# Altium PCB PX4FMUv2.4.6.PcbDoc (part 2 of 3)
Units mil, origin at the board's own origin, x right, y up, seen from the top; angles counter-clockwise.
Board outline 2695 x 2965 mil, 2 copper layers (Top, Bottom), stack 12.756 mil thick; 257 components, 261 nets, 1127 pads, 374 vias.
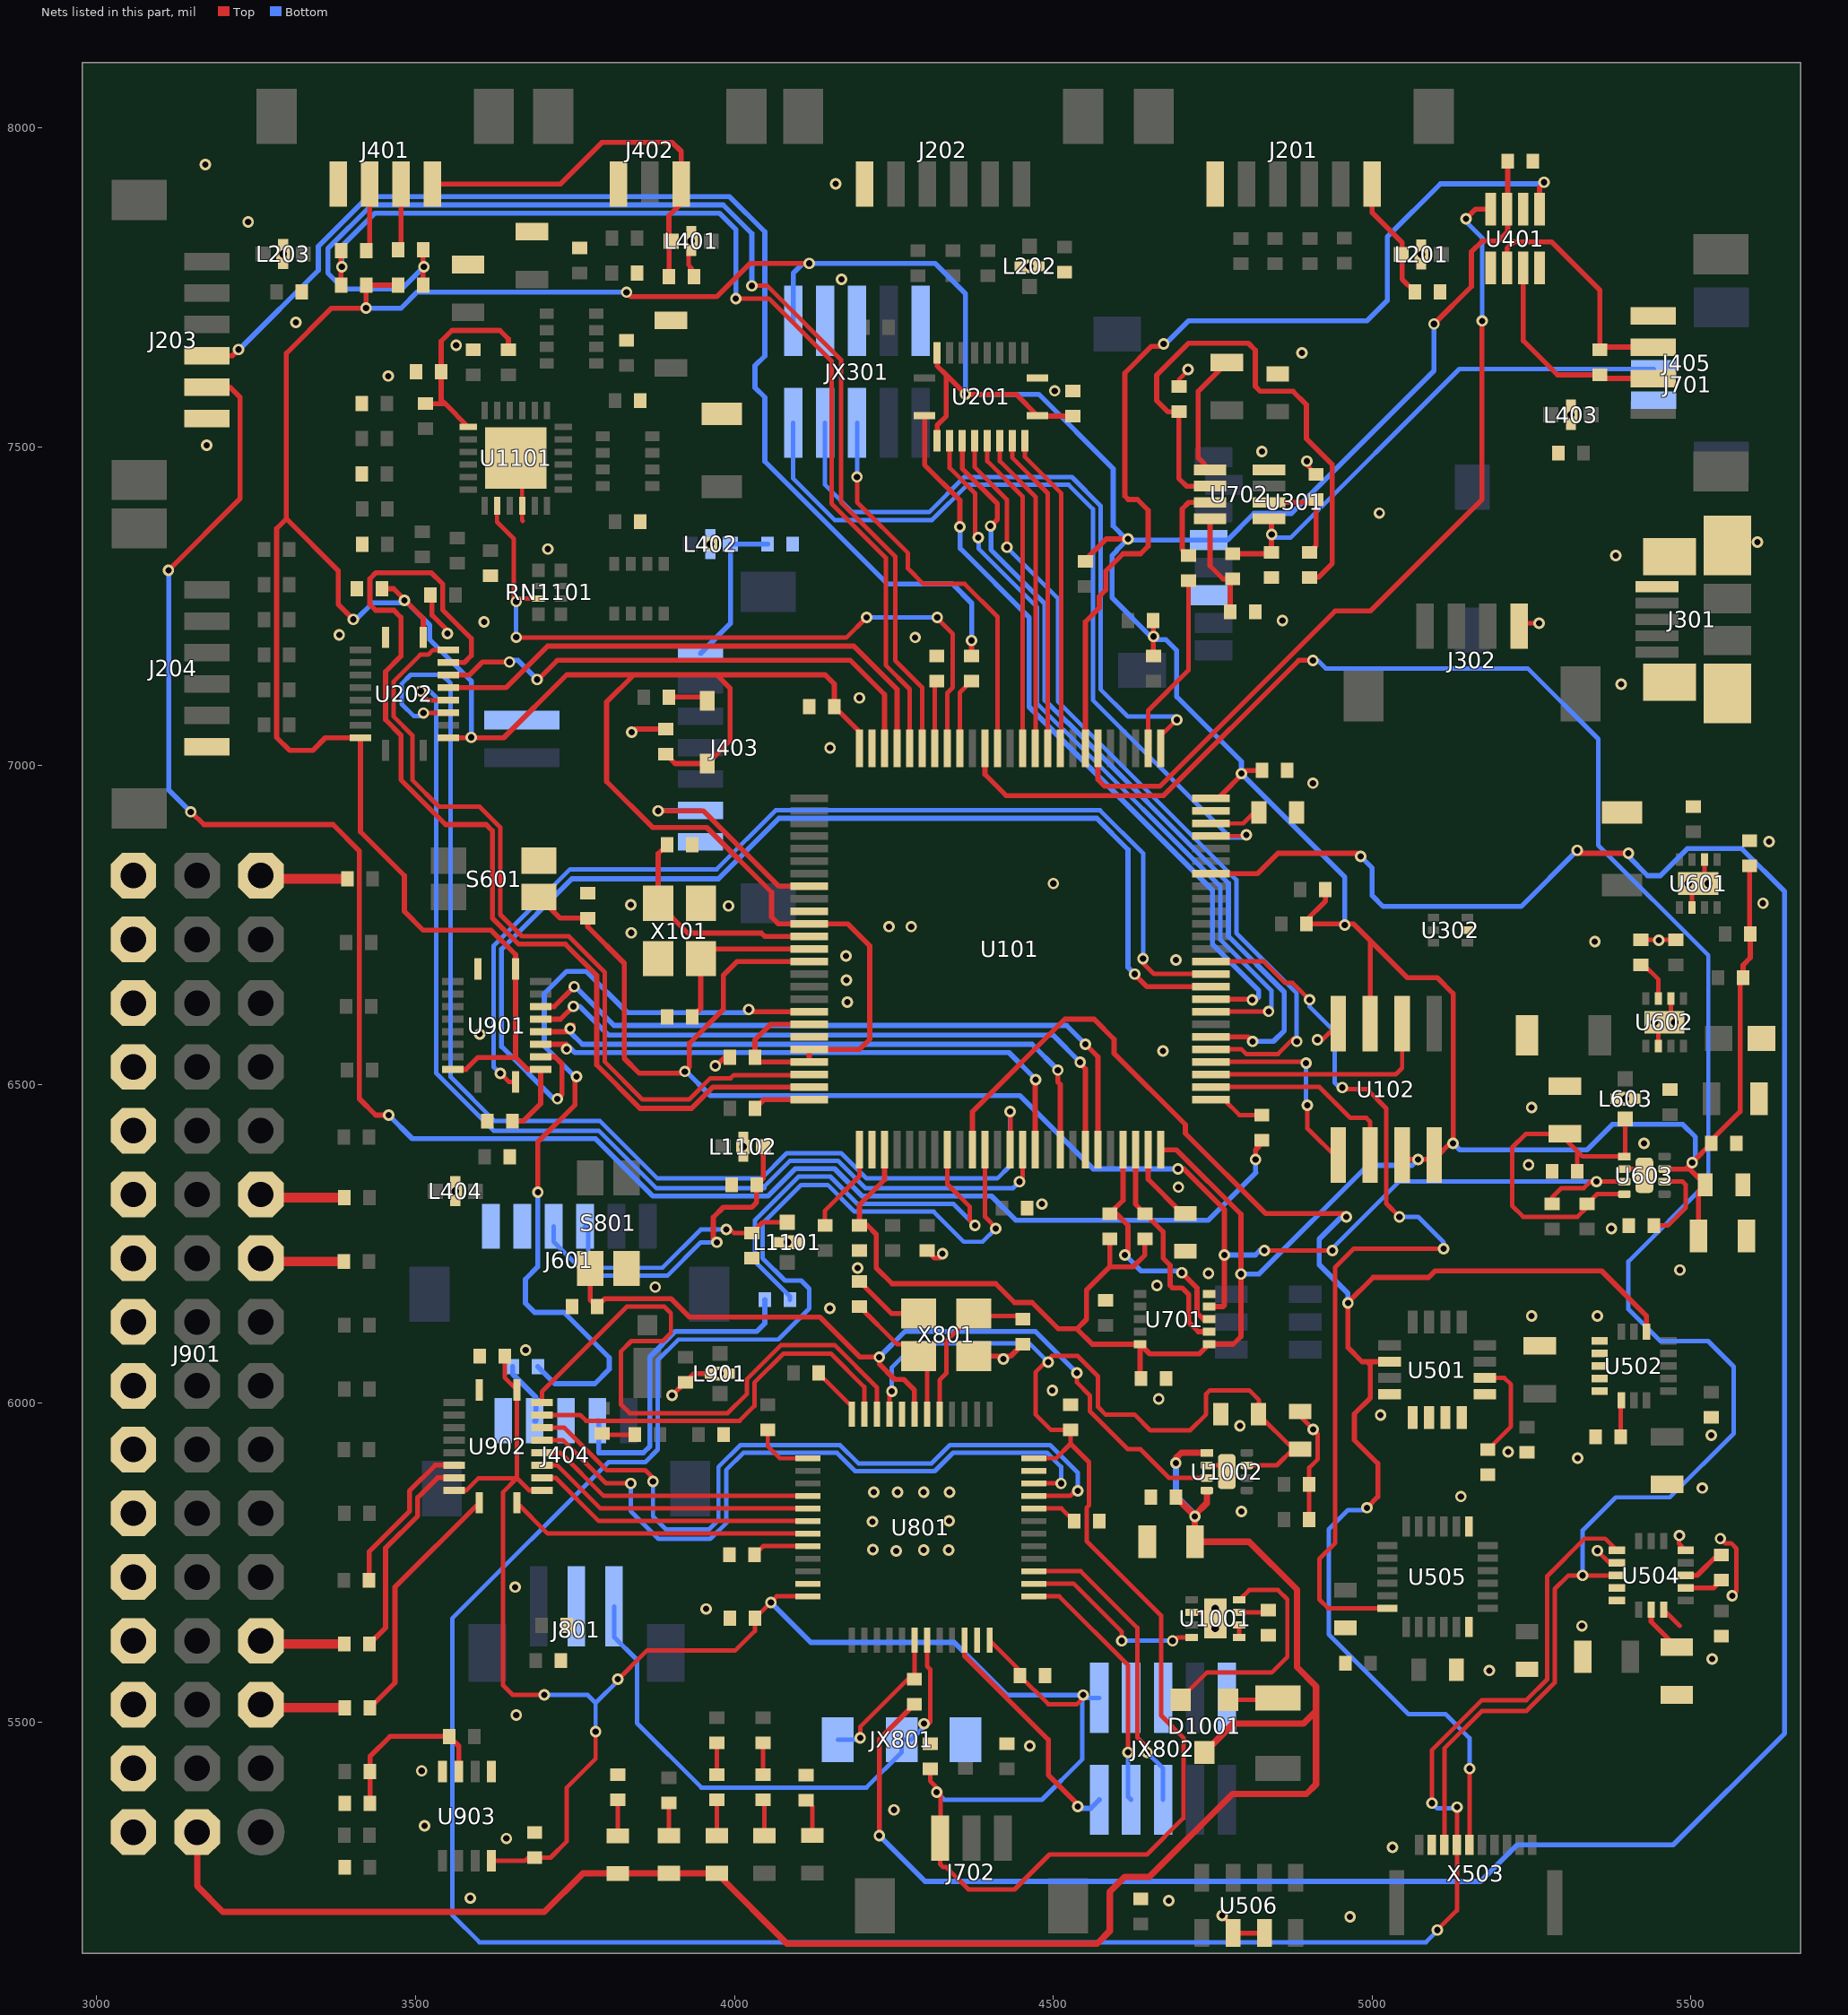
[diagram p2: the nets of this part, all layers, seen from the top]

## Via types
v1: diameter 18, hole 10, Top to Bottom, 374 vias

## Nets (pads, with @x,y where several pads share a name; then routed paths per layer and width w, separated by ;. In a path a pad name is that pad's centre, name@x,y a point inside that pad or via, vN(x,y) a via of type N, cw(c..) or ccw(c..) an arc to the next point about the centre after c; other vN are vias at no path point) (continued)
!VDD_SERVO_VALID: RN1101.3 U101.93 U1101.P$8 | length 1149.9
  Top w7: U1101.P$8@3627.65,7407.68 3627.65,7382.37 3635.34,7374.68 3635.45,7374.68 3654.03,7356.1 3654.03,7261.47 v1(3657.82,7257.68) 3662.43,7262.29 RN1101.3@3692.34,7262.29 ; v1(3657.82,7201.49) 3658.63,7200.68 4175.34,7200.68 v1(4207.34,7232.68) ; v1(4318.13,7232.68) 4316.55,7232.68 4317.34,7231.89 4342.34,7206.89 4342.34,7122.68 4333.91,7114.25 U101.93@4333.91,7027.64
  Bottom w7: v1(3657.82,7201.49) v1(3657.82,7257.68) ; v1(4207.34,7232.68) 4208.13,7232.68 v1(4318.13,7232.68)
ACCEL_DRDY: U101.90 U504.11 X503.3 | length 3471.9
  Top w7: X503.3@5113.6,5307.68 5113.6,5458.94 5172.34,5517.68 5242.34,5517.68 5286.83,5562.17 5286.83,5709.13 5307.98,5730.28 v1(5330.53,5730.28) U504.11@5384.02,5730.28
  Top w8: U101.90@4392.97,7027.64 4392.97,6986.42 4426.1,6953.29 4673.26,6953.29 4885.25,7165.28 v1(4907.34,7165.28)
  Bottom w7: v1(4907.34,7165.28) 4914.74,7165.28 4927.34,7152.68 5244.31,7152.68 5355,7041.99 5355,6875.2 5527.62,6702.59 5527.62,6347.96 5402.34,6222.68 5402.34,6147.68 5452.34,6097.68 5527.34,6097.68 5567.34,6057.68 5567.34,5952.68 5467.34,5852.68 5382.34,5852.68 5330.53,5800.87 v1(5330.53,5730.28) v1@5329.94,5730.28
ALARM: R701.P$2 U101.77 | length 288.8
  Top w7: U101.77@4648.88,7027.64 4648.88,7086.38 4712.34,7149.84 R701.P$2@4712.34,7290.16
BATT_CURRENT_SENS: R1101.P$1 U101.26 | length 140.9
  Top w7: R1101.P$1@4142.34,6279.07 4142.34,6302.68 4196.12,6356.46 U101.26@4196.12,6397.72
BATT_CURRENT_SENS_PROT: J601.3 L1101.P$1 R1104.P$1 | length 455.1
  Top w7: v1(3987.34,6272.68) 3992.34,6274.07 3999.04,6267.37 R1104.P$1@4027.34,6267.37 4044.15,6284.18 L1101.P$1@4083.09,6284.18
  Bottom w7: J601.3@3765.77,6277.68 J601.3@3771.04,6277.68 ; v1(3987.34,6272.68) 3947.34,6272.68 3887.34,6212.68 3788.05,6212.68 3771.04,6229.69 ; 3771.04,6229.69 J601.3@3771.04,6277.68 ; 3771.04,6229.69 J601.3@3771.04,6277.68
BATT_VOLTAGE_SENS: R1102.P$1 U101.25 | length 90.7
  Top w8: R1102.P$1@4032.34,6462.68 4046.12,6476.46 U101.25@4117.38,6476.46
BATT_VOLTAGE_SENS_PROT: J601.4 L1102.P$1 R1103.P$1 | length 539.2
  Top w8: v1(3972.34,6252.68) 3966.95,6258.07 3966.95,6291.81 3982.82,6307.68 4027.34,6307.68 4034.86,6315.2 R1103.P$1@4034.86,6342.68 4045.34,6353.16 L1102.P$1@4045.34,6402.68
  Bottom w7: J601.4@3716.55,6277.68 3716.55,6253.47 3769.34,6200.68 3895.34,6200.68 3947.34,6252.68 v1(3972.34,6252.68) v1@3977.34,6252.68
CAN1_RX: U101.81 U401.4 | length 1338.5
  Top w8: U101.81@4570.14,7027.64 4570.14,6978.35 4580.81,6967.68 4667.34,6967.68 4942.34,7242.68 4997.34,7242.68 5172.66,7418 v1(5172.66,7697.68) ; v1(5147.34,7857.68) 5162.69,7873.03 U401.4@5186.15,7873.03
  Bottom w7: v1(5147.34,7857.68) 5148.13,7852.68 5173.45,7827.36 5172.66,7826.57 v1(5172.66,7697.68)
CAN1_TX: U101.82 U401.1 | length 1553.8
  Top w8: U101.82@4550.45,7027.64 4550.45,7225.79 4572.34,7247.68 4572.34,7265.45 4582.34,7275.45 4582.34,7305.3 4609.51,7332.47 4637.13,7332.47 4648.88,7344.22 4648.88,7400.83 4632.03,7417.68 4617.65,7417.68 4612.34,7422.99 4612.34,7615.92 4654.14,7657.72 v1@4672.3,7657.72 ; U401.1@5262.93,7873.03 5262.93,7907.48 5270,7914.56 v1(5270,7915)
  Bottom w8: v1@4672.3,7657.72 4672.34,7657.68 4712.34,7697.68 4992.34,7697.68 5024.22,7729.56 5024.22,7829.56 5107.34,7912.68 5262.34,7912.68 5264.65,7915 v1(5270,7915)
  other v1: 4673.26,7661.54
CAN2_RX: R216.P$1 U101.51 | length 90
  Top w7: U101.51@4747.3,6476.46 4767.94,6476.46 4792.03,6452.37 R216.P$1@4827.34,6452.37
CAN2_TX: R215.P$1 U101.92 | length 112.9
  Top w7: U101.92@4353.6,7027.64 4353.6,7114.65 R215.P$1@4371.94,7132.99
CAN_H: J405.2 R409.P$1 U401.7 | length 342.2
  Top w8: U401.7@5237.34,7780.51 5237.34,7666.54 5290.89,7612.99 R409.P$1@5357.54,7612.99 5363.21,7607.32 J405.2@5441.04,7607.32
CAN_L: J405.3 R409.P$2 U401.6 | length 390.9
  Top w8: U401.6@5211.74,7780.51 5211.74,7811.14 5222.34,7821.74 5281.55,7821.74 5357.54,7745.75 R409.P$2@5357.54,7652.37 5361.71,7656.54 J405.3@5441.04,7656.54
FMU-!RESET: C609.P$2 R635.P$1 S601.A1 U101.14 U603.3 U701.4 | length 2640.6
  Top w7: v1(4831.33,6239.69) v1(4938.14,6239.69) ; R635.P$1@5282.65,6312.68 5282.65,6322.99 5297.34,6337.68 5332.34,6337.68 5342.5,6347.84 U603.3@5395.84,6347.84
  Top w8: S601.A1@3693.52,6794.14 3726.55,6761.11 C609.P$2@3770.09,6761.11 3770.09,6747.49 3827.34,6690.24 3827.34,6541.11 3850.77,6517.68 v1@3919.44,6517.68 ; v1(3922.34,6520.58) 3929.44,6527.68 3929.44,6564.78 3982.82,6618.16 3982.82,6671.74 4004.07,6692.99 U101.14@4117.38,6692.99 ; v1(4695.8,6367.68) 4704.94,6367.68 4768.52,6304.1 v1(4768.52,6232.68) 4768.52,6153.86 4766.52,6151.86 U701.4@4744.5,6151.86
  Bottom w7: v1(4938.14,6239.69) 4938.14,6243.48 5042.45,6347.79 v1(5352.34,6347.79)
  Bottom w8: v1@3919.44,6517.68 v1(3922.34,6520.58) v1@3923.39,6521.63 ; v1@3922.08,6522.94 v1@3923.39,6521.63 ; v1(4695.8,6367.68) 4562.91,6367.68 4447.91,6482.68 3962.34,6482.68 v1@3923.39,6521.63 ; v1(4768.52,6232.68) 4817.18,6232.68 4824.19,6239.69 v1(4831.33,6239.69)
FMU-BOOT0: R611.P$2 U101.94 | length 106.6
  Top w7: U101.94@4314.23,7027.64 4314.23,7129.88 R611.P$2@4317.34,7132.99
FMU-CH1: U101.45 U901.7 | length 1078.7
  Top w8: U901.7@3696.24,6622.21 3717.31,6622.21 v1(3748.72,6653.62) ; v1(4550.45,6563.15) 4570.14,6543.46 U101.45@4570.14,6397.72
  Bottom w8: v1(3748.72,6653.62) 3749.78,6654.18 3811.28,6592.68 4520.92,6592.68 v1(4550.45,6563.15)
FMU-CH1-PROT: J901.46 R913.P$2 | length 137.8
  Top w15: J901.46@3257.34,6827.68 3262.34,6822.68 R913.P$2@3393.05,6822.68
FMU-CH2: U101.44 U901.6 | length 1031.6
  Top w8: U901.6@3696.24,6602.52 3727.18,6602.52 v1(3747.34,6622.68) ; v1(4542.34,6535.28) 4542.34,6532.68 4550.45,6524.57 U101.44@4550.45,6397.72
  Bottom w8: v1(3747.34,6622.68) 3757.34,6622.68 3802.34,6577.68 4499.94,6577.68 v1(4542.34,6535.28)
FMU-CH3: U101.42 U901.5 | length 984.8
  Top w8: U901.5@3696.24,6582.84 3737.5,6582.84 v1(3742.34,6587.68) ; v1(4507.34,6522.68) 4507.34,6504.1 4511.08,6500.36 U101.42@4511.08,6397.72 ; v1(3742.34,6587.68) 3747.34,6590.28 3747.34,6592.68 v1(3742.34,6587.68)
  Bottom w8: v1(3742.34,6587.68) 3742.34,6582.3 3761.48,6563.15 4466.87,6563.15 v1(4507.34,6522.68)
FMU-CH4: U101.40 U901.4 | length 910.2
  Top w8: U901.4@3696.24,6563.15 3736.72,6563.15 v1(3736.72,6555.75) ; U101.40@4471.71,6397.72 4471.71,6507.05 v1(4472.34,6507.68)
  Bottom w8: v1@3740.49,6559.53 3749.87,6550.15 4430.74,6550.15 v1@4471.71,6509.18
FMU-CH5: U101.60 U901.3 | length 1785.4
  Top w8: U901.3@3696.24,6543.47 3718.76,6543.47 3729.55,6532.68 3729.55,6484.77 v1(3722.46,6477.68) ; v1(4627.93,6673.31) 4629.19,6671.23 4646.79,6653.62 U101.60@4747.3,6653.62
  Bottom w8: v1(3722.46,6477.68) 3721.87,6477.68 3716.71,6477.68 3634.84,6559.55 3634.84,6712.5 3745.01,6822.68 3975.01,6822.68 4069.87,6917.54 4568.42,6917.54 4617.34,6868.62 4617.34,6683.9 v1(4627.93,6673.31)
FMU-CH6: U101.61 U901.1 | length 1657
  Top w7: v1(3632.93,6517.68) 3646.51,6504.1 U901.1@3656.87,6504.1 ; v1(4640.96,6697.68) 4640.37,6698.81 4640.37,6691.19 4658.25,6673.31 U101.61@4747.3,6673.31
  Bottom w7: v1(3632.93,6517.68) 3632.34,6517.68 3622.34,6527.68 3622.34,6717.68 3742.34,6837.68 3972.34,6837.68 4064.7,6930.04 4573.6,6930.04 4640.96,6862.68 v1(4640.96,6697.68)
FMU-CH6-PROT: J901.31 R902.P$2 | length 132.6
  Top w15: J901.31@3257.34,6327.68 3262.34,6322.68 R902.P$2@3387.9,6322.68
FMU-I2C1_SCL: R401.P$1 R404.P$1 U101.95 | length 1913.4
  Top w7: v1(4027.34,7752.68) 4051.44,7752.68 4167.34,7636.78 4167.34,7413.11 4252.34,7328.11 4252.34,7164.84 4294.54,7122.64 U101.95@4294.54,7027.64
  Top w8: R404.P$1@3511.72,7809.12 3511.72,7753.92 R401.P$1@3512.03,7753.61
  Bottom w8: v1(3513,7782.68) 3478,7747.68 3387.34,7747.68 3362.34,7772.68 3362.34,7811.07 3430.95,7879.68 3982.35,7879.68 4027.34,7834.69 v1(4027.34,7752.68)
FMU-I2C1_SDA: R402.P$1 R405.P$1 U101.96 | length 1692.9
  Top w7: v1(4002.34,7732.68) 4054.47,7732.68 4152.34,7634.81 4152.34,7411.14 4237.34,7326.14 4237.34,7157.68 4274.86,7120.16 U101.96@4274.86,7027.64
  Top w8: R402.P$1@3382.96,7753.61 R405.P$1@3382.96,7807.68
  Bottom w8: v1(3384.31,7782.68) 3384.31,7814.65 3436.34,7866.68 3976.48,7866.68 4002.34,7840.82 v1(4002.34,7732.68)
FMU-I2C2_SCL: R306.P$1 U101.47 U701.3 | length 377.2
  Top w8: U101.47@4609.51,6397.72 4609.51,6318.31 R306.P$1@4588.88,6297.68 4598.84,6297.68 4617.34,6279.18 4617.34,6237.68 v1(4612.34,6232.68) ; v1(4701.65,6205) 4725.65,6181 4725.65,6179.89 ; 4725.65,6176.06 4725.65,6141.83 4735.31,6132.17 U701.3@4744.5,6132.17
  Bottom w8: v1(4612.34,6232.68) 4612.93,6232.68 4637.93,6207.68 v1@4693.8,6207.68
FMU-I2C2_SDA: R307.P$1 U101.48 U701.2 | length 351.7
  Top w8: U101.48@4629.19,6397.72 4629.19,6312.37 R307.P$1@4643.88,6297.68 4672.34,6269.22 4672.34,6227.68 4683.33,6216.69 4683.33,6185 4687.34,6180.99 4702.34,6180.99 4712.65,6170.68 4712.65,6127.37 4727.54,6112.48 U701.2@4744.5,6112.48
FMU-SWCLK: JX301.4 U101.76 | length 1076.9
  Top w7: U101.76@4668.56,7027.64 4668.56,7046.77 v1(4693.8,7072.01) v1@4697.34,7072.68
  Bottom w7: JX301.4@4142.34,7537.66 4142.34,7440.63 4185.29,7397.68 4305.37,7397.68 4360.32,7452.63 4529.36,7452.63 4574.34,7407.65 4574.34,7120.01 4617.34,7077.01 4693.01,7077.01 v1@4697.34,7072.68
FMU-SWDIO: JX301.2 U101.72 | length 1309.6
  Top w7: U101.72@4747.3,6889.85 v1@4801.11,6889.85
  Bottom w7: JX301.2@4092.34,7537.66 4092.34,7450.36 4157.34,7385.36 4310.01,7385.36 4365.29,7440.63 4524.39,7440.63 4562.34,7402.68 4562.34,7103.04 4777.7,6887.68 4797.34,6887.68 v1(4802.82,6891.56) v1@4801.11,6889.85
FMU-SWO: JX301.6 U101.89 | length 650.7
  Top w7: U101.89@4412.65,7027.64 4412.65,7233.69 4361.18,7285.16 4296.49,7285.16 4272.34,7309.32 4272.34,7333.47 4192.34,7413.47 v1@4192.34,7448.74 ; v1@4192.34,7448.74 4193.13,7447.95 v1(4192.34,7452.95) v1@4192.34,7448.74
  Bottom w7: JX301.6@4192.34,7537.66 4192.34,7448.74 v1@4193.13,7447.95
FMU-UART4_RX: U101.24 U202.8 | length 1699.3
  Top w8: U202.8@3551.24,7161.89 3576.55,7161.89 3587.34,7172.68 3587.34,7199.6 3542.34,7244.6 3542.34,7285.16 3524.82,7302.68 3437.64,7302.68 3428.18,7293.22 3428.18,7252.99 3437.34,7243.83 3465.8,7243.83 3476.95,7232.68 3476.95,7171.82 3452.81,7147.68 3452.81,7072.21 3476.95,7048.07 3476.95,6977.99 3547.22,6907.72 3610.83,6907.72 3620.48,6898.07 3620.48,6761.23 3661.53,6720.18 3735.01,6720.18 3783.97,6671.23 3783.97,6530.74 3852.03,6462.68 3932.73,6462.68 3966.19,6496.14 U101.24@4117.38,6496.14
FMU-UART4_TX: U101.23 U202.9 | length 1281.8
  Top w7: U202.9@3551.24,7181.58 3527.29,7181.58 3519.69,7173.98 3507.34,7173.98 3465.31,7131.95 3465.31,7077.39 3494.94,7047.76 3494.94,6977.68 3536.64,6935.98 3600.25,6935.98 3632.98,6903.25 3632.98,6766.41 3666.71,6732.68 3740.19,6732.68 3796.47,6676.4 3796.47,6535.92 3855.92,6476.46 3928.83,6476.46 3962.37,6510 3994.07,6510 3999.04,6514.97 4116.51,6514.97 U101.23@4117.38,6515.83
FMU-UART7_RX: U101.38 U202.4 | length 1951.2
  Top w7: v1@3513.35,7083.15 U202.4@3551.24,7083.15 ; U101.38@4432.34,6397.72 4432.93,6398.31 4432.93,6457.68 v1(4432.34,6457.68)
  Bottom w7: v1@3513.35,7083.15 3512.6,7082.39 3508,7077.68 3497.34,7077.68 3478,7097.02 3478,7128.34 3492.34,7142.68 3541.56,7142.68 3555,7129.24 3555,6511.99 3624.31,6442.68 3789.31,6442.68 3879.31,6352.68 4042.34,6352.68 4082.34,6392.68 4167.34,6392.68 4207.34,6352.68 4412.34,6352.68 4432.34,6372.68 v1(4432.34,6457.68)
  other v1: 3512.34,7082.65
FMU-UART7_TX: U101.39 U202.5 | length 1752.5
  Top w7: v1@3507.34,7114.2 3518.7,7102.84 U202.5@3551.24,7102.84 ; v1(4447.34,6347.68) 4447.93,6347.68 4452.03,6351.78 U101.39@4452.03,6397.72
  Bottom w7: v1@3507.34,7114.2 v1(3508.13,7116.93) 3522.42,7116.93 3532.34,7107.02 3532.34,6517.68 3622.34,6427.68 3787.34,6427.68 3877.34,6337.68 4047.34,6337.68 4047.34,6340.71 4087.31,6380.68 4162.37,6380.68 4205.37,6337.68 4437.34,6337.68 v1(4447.34,6347.68)
FMU-UART8_RX: U101.97 U202.6 | length 851.2
  Top w8: U202.6@3551.24,7122.52 3642.02,7122.52 3707.18,7187.68 4187.34,7187.68 4255.17,7119.85 U101.97@4255.17,7027.64
FMU-UART8_TX: U101.98 U202.7 | length 828.7
  Top w8: U202.7@3551.24,7142.21 3584.34,7142.21 3604.81,7162.68 v1(3647.34,7162.68) ; v1(3690.72,7135.28) 3690.72,7133.67 3722.34,7165.28 4181.9,7165.28 4235.49,7111.69 U101.98@4235.49,7027.64
  Bottom w8: v1(3647.34,7162.68) 3647.34,7165.28 3660.72,7165.28 v1(3690.72,7135.28)
FMU-USART2_CTS: U101.84 U201.9 | length 506.2
  Top w7: U201.9@4455.77,7509.88 4455.77,7484.25 4512.34,7427.68 4512.34,7028.9 U101.84@4511.08,7027.64
FMU-USART2_RTS: U101.85 U201.8 | length 505.2
  Top w7: U201.8@4436.08,7509.88 4436.08,7482.68 4491.4,7427.36 U101.85@4491.4,7027.64
FMU-USART2_RX: U101.87 U201.6 | length 505.2
  Top w7: U201.6@4396.71,7509.88 4396.71,7477.68 4452.03,7422.36 U101.87@4452.03,7027.64
FMU-USART2_TX: U101.86 U201.7 | length 505.7
  Top w7: U201.7@4416.4,7509.88 4416.4,7477.68 4472.34,7421.74 4472.34,7028.27 U101.86@4471.71,7027.64
FMU-USART3_CTS: U101.58 U201.3 | length 1197.6
  Top w7: U201.3@4337.66,7509.88 4337.66,7467.04 4377.34,7427.36 4377.34,7360.82 v1@4382.34,7355.82 ; U101.58@4747.3,6614.25 4747.82,6614.77 v1(4837.93,6614.77)
  Bottom w7: v1@4382.34,7355.82 4382.93,7355.82 4382.93,7340.47 4474.84,7248.56 4474.84,7097.5 4517.16,7055.18 4517.83,7055.18 4762.32,6810.69 4762.32,6727.37 4842.34,6647.35 4842.34,6619.18 v1(4837.93,6614.77)
  other v1: 4382.34,7357.68
FMU-USART3_RTS: U101.59 U201.1 | length 1212.4
  Top w8: U201.1@4298.29,7549.25 4298.29,7471.73 4353.6,7416.42 v1(4353.6,7374.68) ; U101.59@4747.3,6633.94 4811.67,6633.94 4812.93,6632.68 v1@4817.82,6632.68
  Bottom w8: v1(4353.6,7374.68) 4354.19,7374.68 4354.19,7340.83 4462.34,7232.68 4462.34,7092.33 4749.82,6804.85 4749.82,6720.2 4822.34,6647.68 4822.34,6637.2 4817.82,6632.68 v1(4812.34,6632.68)
FMU-USART3_RX: U101.56 U201.4 | length 1270.1
  Top w8: U201.4@4357.34,7509.88 4357.34,7466.26 4412.34,7411.26 4412.34,7385.86 v1@4401.16,7374.68 ; U101.56@4747.3,6574.88 4805.73,6574.88 v1(4812.93,6567.68)
  Bottom w8: v1@4401.16,7374.68 4401.75,7374.68 4402.34,7374.09 4402.34,7338.74 4487.34,7253.74 4487.34,7102.68 4522.34,7067.68 4523,7067.68 4774.82,6815.87 4774.82,6732.55 4862.34,6645.03 4862.34,6584.52 4845.5,6567.68 v1(4812.93,6567.68) v1@4812.34,6567.68
  other v1: 4401.75,7375.86
FMU-USART3_TX: U101.55 U201.5 | length 1301.5
  Top w7: U201.5@4377.03,7509.88 4377.03,7467.99 4427.34,7417.68 v1(4427.34,7342.68) ; U101.55@4747.3,6555.2 4795.61,6555.2 4802.77,6548.04 4852.7,6548.04 4877.34,6572.68 4882.02,6568 v1(4882.02,6567.68)
  Bottom w7: v1(4427.34,7342.68) 4507.34,7262.68 4507.34,7101.03 4787.32,6821.05 4787.32,6737.73 4882.02,6643.02 v1(4882.02,6567.68)
FMU-VDD_3V3: C101.P$1 C201.P$1 C202.P$1 C402.P$1 C603.P$1 C604.P$1 C606.P$1 C607.P$1 C608.P$1 C610.P$1 C612.P$1 C616.P$1 C701.P$1 C902.P$1 D602.A JX301.1 R301.P$2 R302.P$2 R303.P$2 R304.P$2 R305.P$2 R306.P$2 R307.P$2 R401.P$2 R402.P$2 R602.P$2 R604.P$2 U101.11 U101.19 U101.21 U101.22 U101.28 U101.50 U101.75 U101.100 U102.3 U102.7 U102.8 U201.2 U201.10 U201.19 U202.2 U202.10 U202.19 U301.4 U401.3 U603.7 U701.1 U701.10 U901.2 U901.10 U901.19 | length 12674.4
  Top w8: v1(3402.34,7229.45) 3378.52,7253.27 3378.52,7306.12 3297.34,7387.3 ; C202.P$1@3447.03,7277.68 3465.61,7277.68 3511.87,7231.42 U202.10@3511.87,7201.26 ; R401.P$2@3472.65,7753.61 R402.P$2@3422.34,7753.61 v1(3422.34,7717.68) 3368.18,7717.68 3297.34,7646.84 3297.34,7387.3 ; U202.2@3551.24,7043.78 3638.28,7043.78 3737.18,7142.68 3842.34,7142.68 ; U901.19@3558.44,6523.78 3578.98,6523.78 3597.88,6542.68 3656.79,6542.68 ; C902.P$1@3652.03,6442.68 3668.98,6442.68 3696.24,6469.94 U901.2@3696.24,6523.78 3675.69,6523.78 3656.79,6542.68 ; v1(3830.79,7742.68) 3837.8,7735.67 3972.6,7735.67 4024.72,7787.79 v1(4117.38,7787.79) 4107.34,7787.68 ; C612.P$1@3892.34,7018.3 3907.17,7003.47 D602.A@3957.34,7003.47 3993.09,7039.22 3993.09,7121.93 3972.34,7142.68 ; U101.19@4117.38,6594.57 4056.75,6594.57 4032.34,6570.16 C606.P$1@4032.34,6542.68 4039.51,6535.51 U101.22@4117.38,6535.51 U101.21@4117.38,6555.2 4196.36,6555.2 4212.34,6571.18 4212.34,6717.49 4177.78,6752.05 U101.11@4117.38,6752.05 4068.91,6752.05 4058.28,6762.68 4058.28,6801.74 3956.77,6903.25 3871.77,6903.25 3799.65,6975.37 3799.65,7099.99 3842.34,7142.68 ; U101.100@4196.12,7027.64 4196.12,7053.32 C608.P$1@4156.76,7092.68 4156.76,7128.26 4142.34,7142.68 3972.34,7142.68 ; U101.28@4235.49,6397.72 4235.49,6350.64 4196.12,6311.27 C610.P$1@4196.12,6279.07 4208.67,6279.07 4222.34,6265.4 4222.34,6212.68 4247.34,6187.68 4409.91,6187.68 4439.35,6158.24 4466.78,6158.24 4508.12,6116.89 4537.34,6116.89 ; U201.2@4317.97,7509.88 4317.97,7533.96 4332.34,7548.33 4332.34,7612.68 ; U201.19@4317.97,7647.68 4317.97,7627.05 4332.34,7612.68 ; C201.P$1@4530.77,7548.31 4476.39,7548.31 U201.10@4475.45,7549.25 4442.02,7582.68 v1(4362.34,7582.68) 4332.34,7612.68 ; R303.P$2@4542.34,7314.83 4583.33,7355.82 v1(4617.34,7355.82) ; R306.P$2@4588.88,6258.3 4588.88,6214.22 ; C701.P$1@4632.03,6032.17 4636.24,6036.38 U701.10@4636.24,6092.8 ; R307.P$2@4643.88,6258.3 4643.88,6232.68 4625.42,6214.22 4588.88,6214.22 ; R301.P$2@4657.03,7172.68 R302.P$2@4657.03,7227.68 ; U101.50@4668.56,6397.72 4693.36,6397.72 4794.47,6296.62 v1(4794.47,6202.79) 4794.47,6104.88 4782.39,6092.8 U701.1@4744.5,6092.8 4729.38,6077.68 4651.36,6077.68 U701.10@4636.24,6092.8 ; U101.75@4747.3,6948.9 4758.56,6948.9 4802.34,6992.68 C607.P$1@4827.65,6992.68 ; R305.P$2@4927.03,6805.79 4927.03,6787.47 4896.72,6757.16 4896.72,6752.36 R304.P$2@4897.03,6752.05 4971.02,6752.05 4997.34,6725.73 ; U102.3@4997.34,6595.37 4997.34,6725.73 ; U102.7@5047.34,6382.68 v1(5072.34,6382.68) 5097.34,6382.68 5127.34,6412.68 5127.34,6642.68 5102.34,6667.68 5055.39,6667.68 4997.34,6725.73 ; v1(5097.22,7692.79) 5155.88,7751.45 5155.88,7805.98 5172.66,7822.76 5197.42,7822.76 5212.96,7838.3 C402.P$1@5212.96,7947.99 ; U603.7@5458.84,6367.52 5492.18,6367.52 ; C604.P$1@5512.34,6262.68 5512.34,6332.21 C603.P$1@5522.81,6342.68 5497.97,6367.52 5492.18,6367.52 ; C101.P$1@5592.34,6842.99 5592.34,6737.42 R602.P$2@5593.47,6736.29 5593.47,6698.81 5582.03,6687.37 R604.P$2@5582.03,6667.68 5577.34,6662.99 5577.34,6457.68 5532.34,6412.68 C616.P$1@5532.34,6407.68 v1(5502.34,6377.68) 5492.18,6367.52 ; 3297.34,7387.3 3282.06,7372.02 3282.06,7044.38 3302.34,7024.1 3338.76,7024.1 3358.44,7043.78 U202.19@3413.44,7043.78 3413.44,6896.58 3482.37,6827.65 3482.37,6771.71 3512.03,6742.05 3618.61,6742.05 3656.87,6703.79 U901.10@3656.87,6681.26 3656.87,6542.76 3656.79,6542.68 ; 3842.34,7142.68 3972.34,7142.68 ; 4537.34,6116.89 4561.43,6092.8 U701.10@4636.24,6092.8 ; 4537.34,6116.89 4552.34,6131.89 4552.34,6177.68 4588.88,6214.22
  Bottom w8: v1(3402.34,7229.45) 3407.34,7230.28 3432.34,7255.28 v1@3487.34,7255.28 ; v1(3422.34,7717.68) 3477.34,7717.68 3502.34,7742.68 v1(3830.79,7742.68) ; v1@3482.83,7259.92 v1@3487.34,7255.28 ; v1(3587.34,7044.49) 3587.34,7132.68 3522.34,7197.68 3522.34,7220.28 v1@3487.34,7255.28 ; JX301.1@4092.34,7697.66 4092.34,7772.68 4107.34,7787.68 ; v1(4117.38,7787.79) 4107.34,7787.68 ; v1(4794.47,6202.79) 4822.9,6202.79 4993.4,6373.29 5062.95,6373.29 v1(5072.34,6382.68) ; v1(4957.34,6750.28) 4957.34,6825.6 v1(4795.26,6987.68) 4795.26,7006.73 4693.8,7108.19 4693.8,7180.79 4676.91,7197.68 4658.13,7197.68 4592.34,7263.47 4592.34,7329.76 4600.26,7337.68 4600.26,7338.74 v1(4617.34,7355.82) ; v1(5097.22,7692.79) 5097.22,7619.32 4873.56,7395.66 4815,7395.66 4773.37,7354.02 U301.4@4743.96,7354.02 4619.14,7354.02 v1(4617.34,7355.82) ; v1@5127.34,6412.68 v1(5127.34,6407.91) 5137.56,6397.68 5337.34,6397.68 5377.34,6437.68 5487.34,6437.68 5507.34,6417.68 5507.34,6382.68 v1(5502.34,6377.68) ; 4107.34,7787.68 4314.9,7787.68 4362.34,7740.24 v1(4362.34,7582.68) 4477.34,7582.68 4594.16,7465.86 4594.16,7375.86 4614.2,7355.82 v1(4617.34,7355.82)
  other v1: 4657.34,7202.68 3482.34,7259.44
FMU-VDD_5V5: C601.P$1 C615.P$1 L603.P$2 R603.P$1 U603.1 U603.4 | length 579.8
  Top w7: C601.P$1@5302.34,6415.28 5322.03,6395.59 ; C601.P$1@5302.34,6422.68 5241.25,6422.68 5220,6401.44 5220,6309.81 5237.13,6292.68 5322.34,6292.68 5337.34,6307.68 R603.P$1@5337.34,6312.68 5352.81,6328.15 U603.4@5395.84,6328.15 ; C615.P$1@5322.03,6363.84 5322.03,6395.59 ; L603.P$2@5397.34,6446.18 5397.34,6388.71 U603.1@5395.84,6387.21 5330.41,6387.21 5322.03,6395.59
FMU_AUX_ADC1: R408.P$1 U101.18 | length 1324.6
  Top w8: v1(3691.71,6330.99) 3691.71,6409.72 3749.78,6467.79 v1@3749.78,6512.68 ; v1(4022.34,6617.68) 4025.77,6614.25 U101.18@4117.38,6614.25
  Bottom w8: R408.P$1@3691.72,6057.68 3718.41,6030.99 3781.05,6030.99 3803.84,6053.78 3803.84,6071.59 3732.74,6142.68 3686.75,6142.68 3672.34,6157.09 3672.34,6194.85 3691.71,6214.22 v1(3691.71,6330.99) ; v1@3751.06,6511.4 3701.87,6560.59 3701.87,6642.68 3736.87,6677.68 3767.34,6677.68 3832.34,6612.68 v1@4017.34,6612.68 ; v1@4017.34,6612.68 4018.84,6615.99 v1(4022.34,6617.68) v1@4017.34,6612.68
  other v1: 3752.34,6512.68
FMU_AUX_ADC1_PROT: J404.4 R408.P$2 | length 139.1
  Bottom w8: R408.P$2@3652.34,6057.68 3652.34,6045.99 3688.92,6009.41 ; J404.4@3686.75,5972.68 J404.4@3688.92,5972.68 ; J404.4@3688.92,5972.68 3688.92,6009.41 ; J404.4@3688.92,5972.68 3688.92,6009.41
FMU_AUX_ADC2: R407.P$1 U101.33 | length 689
  Top w7: U101.33@4333.91,6397.72 4333.91,6343.79 4369.34,6308.36 4369.34,6287.07 v1(4377.34,6279.07)
  Bottom w7: R407.P$1@4087.03,6162.68 4087.03,6167.99 4032.34,6222.68 4032.34,6287.33 4100.69,6355.68 4150.34,6355.68 4193.34,6312.68 4343.73,6312.68 v1(4377.34,6279.07)
FMU_AUX_ADC2_PROT: J404.2 R407.P$2 | length 565.7
  Bottom w8: J404.2@3785.17,5972.68 J404.2@3787.34,5972.68 ; R407.P$2@4047.65,6162.68 4047.65,6125.59 4034.74,6112.68 3907.16,6112.68 3867.34,6072.86 3867.34,5932.68 3857.34,5922.68 3787.34,5922.68 ; 3787.34,5922.68 J404.2@3787.34,5972.68 ; 3787.34,5922.68 J404.2@3787.34,5972.68
FRAM_MISO: U101.53 U102.2 | length 366.9
  Top w7: U101.53@4747.3,6515.83 5037.1,6515.83 5047.34,6526.07 U102.2@5047.34,6588.68
FRAM_MOSI: U101.54 U102.5 | length 321.9
  Top w7: U101.54@4747.3,6535.51 4893.52,6535.51 v1(4896.72,6533.82) ; v1(4898.71,6467.79) 4898.71,6431.31 U102.5@4947.34,6382.68
  Bottom w7: v1(4896.72,6533.82) 4896.72,6469.78 v1(4898.71,6467.79)
FRAM_SCK: U101.52 U102.6 | length 324.8
  Top w7: U101.52@4747.3,6496.14 4917.7,6496.14 4966.16,6447.68 4991.15,6447.68 4997.34,6441.49 U102.6@4997.34,6389.37
GND: B601.2 C101.P$2 C102.P$2 C103.P$1 C201.P$2 C202.P$2 C401.P$2 C402.P$2 C501.P$2 C502.P$2 C503.P$2 C504.P$2 C505.P$2 C506.P$2 C507.P$2 C508.P$2 C509.P$2 C511.P$2 C512.P$2 C513.P$2 C514.P$2 C515.P$2 C601.P$2 C602.P$1 C603.P$2 C604.P$2 C605.P$2 C606.P$2 C607.P$2 C608.P$2 C609.P$1 C610.P$2 C611.P$2 C612.P$2 C613.P$2 C614.P$2 C615.P$2 C616.P$2 C617.P$2 C618.P$2 C701.P$2 C702.P$2 C703.P$2 C704.P$2 C801.P$1 C802.P$2 C803.P$2 C804.P$2 C805.P$2 C806.P$1 C901.P$2 C902.P$2 C903.P$2 C1001.P$2 C1002.P$2 C1003.P$2 C1004.P$2 C1005.P$2 C1008.P$2 C1101.P$2 C1102.P$2 C1103.P$2 C1104.P$2 C1105.P$2 C1106.P$2 C1107.P$2 C1108.P$2 C1109.P$2 C1110.P$2 D201.A D202.A D203.A D401.A D402.A D403.A D404.A D701.A D801.A D901.A D902.A D903.A J201.6 J202.6 J203.6 J204.6 J301.GND J301.GND1 J301.GND2 J301.GND3 J301.GND4 J302.4 J401.4 J402.3 J403.7 J404.3 J404.5 J405.4 J601.5 J601.6 J701.2 J801.P$2 J901.3 J901.6 J901.9 J901.12 J901.15 J901.18 J901.21 J901.24 J901.27 J901.30 J901.33 J901.36 J901.39 J901.42 J901.45 J901.48 JX301.3 JX301.5 JX301.9 JX801.3 JX802.3 JX802.5 JX802.9 L201.P$3 L201.P$4 L201.P$5 L202.P$3 L202.P$4 L202.P$5 L203.P$3 L203.P$4 L203.P$5 L401.P$3 L401.P$4 L401.P$5 L402.P$3 L402.P$4 L402.P$5 L403.P$3 L403.P$4 L403.P$5 L404.P$3 L404.P$4 L404.P$5 L603.P$3 L603.P$4 L603.P$5 L901.P$3 L901.P$4 L901.P$5 L1101.P$3 L1101.P$4 L1101.P$5 L1102.P$3 L1102.P$4 L1102.P$5 R102.P$2 R403.P$1 R610.P$2 R611.P$1 R615.P$2 R616.P$2 R617.P$2 R621.1 R702.P$2 R704.P$1 R706.P$2 R708.P$1 R711.P$1 R713.P$2 R801.P$2 R802.P$2 R919.P$1 R1001.P$1 R1002.P$1 R1103.P$2 R1104.P$2 R1107.P$2 R1111.P$2 R1114.P$2 R1115.P$1 S601.B3 S801.B3 U101.10 U101.20 U101.27 U101.74 U101.99 U102.4 U201.11 U202.11 U301.6 U302.2 U401.2 U401.5 U401.8 U501.8 U501.9 U501.10 U501.11 U501.12 U501.13 U502.9 U502.10 U502.11 U502.12 U502.13 U504.5 U504.10 U504.12 U504.13 U504.16 U505.1 U505.18 U506.2 U506.3 U601.2 U601.6 U601.GND U601.P$2 U601.P$3 U602.2 U602.6 U602.GND U602.P$2 U602.P$3 U603.2 U603.GND U701.5 U702.4 U801.8 U801.23 U801.35 U801.47 U901.11 U902.11 U903.1 U903.4 U1001.2 U1001.5 U1001.6 U1001.GND U1001.P$2 U1001.P$3 U1002.2 U1002.GND U1101.P$10 U1101.P$25 X101.2 X101.4 X503.2 X801.2 X801.4 | length 1589.1
  Top w7: U1101.P$25@3657.18,7482.48 3667.02,7472.64 U1101.P$10@3667.02,7407.68 3667.02,7384.92 3668.04,7383.9 ; L401.P$5@3932.34,7822.68 3928.57,7818.91 3928.57,7785.01 3932.18,7781.39 3930.47,7781.39 3937.03,7774.84 D401.A@3937.03,7766.93 ; C704.P$2@4697.34,7594.54 4697.34,7605.9 v1@4711.77,7620.33 ; U1001.2@4716.91,5672.52 4744.47,5672.52 U1001.GND@4754.31,5662.68 ; U1002.2@4740.84,5902.83 4762.5,5902.83 U1002.GND@4772.34,5892.99 ; U1001.5@4791.71,5633.15 U1001.6@4791.71,5652.84 ; C1004.P$2@4887.34,5987.52 4887.34,5980 4915,5952.34 4915,5912.52 4901.72,5899.23 C1002.P$2@4901.72,5872.99 R1002.P$1@4901.72,5817.99 ; v1@4897.34,7476.54 4897.34,7472.06 R706.P$2@4912.34,7457.06 ; v1@4916.24,6569.44 4921.4,6569.44 U102.4@4947.34,6595.37 ; J302.4@5230.88,7218.98 5235.51,7223.61 v1(5262.26,7223.61) ; v1(5353.42,5769.04) 5372.48,5749.97 U504.10@5384.02,5749.97 ; U603.2@5395.84,6367.52 5417.5,6367.52 U603.GND@5427.34,6357.68 ; R616.P$2@5421.71,6727.17 R615.P$2@5476.71,6727.17 ; U602.2@5449,6560.28 5449,6587.84 U602.GND@5458.84,6597.68 5468.68,6607.52 U602.6@5468.68,6635.08 ; U504.16@5457.65,5676.34 5482.74,5651.25 ; v1@5481.52,5793.62 5481.52,5780.03 U504.5@5491.9,5769.65 ; U601.2@5502.03,6777.88 5502.03,6805.44 U601.GND@5511.87,6815.28 5521.71,6825.12 U601.6@5521.71,6852.68 ; v1@5547.96,5787.99 5547.96,5786.5 5553.74,5780.72 5563.29,5780.72 5571.84,5772.17 5571.84,5705.35 v1(5564.95,5698.46)
  Top w8: R1114.P$2@3522.96,7267.68 3525.87,7264.77 3525.87,7236.27 v1@3547.68,7214.45 ; v1(3839.13,7052.68) 3844.13,7057.68 C612.P$2@3892.34,7057.68 ; v1(3902.34,6012.49) D903.A@3923.13,6033.3 3936.61,6046.78 L901.P$3@3961.59,6046.78 L901.P$5@3977.34,6046.78 ; v1@3972.8,6530.74 3984.74,6542.68 C606.P$2@3992.96,6542.68 ; C806.P$1@4196.12,6191.23 4246.21,6141.14 X801.4@4289.03,6141.14 ; R610.P$2@4302.34,6239.69 4314.04,6227.99 v1@4322.73,6227.99 ; X801.2@4375.65,6074.22 4433.57,6074.22 C805.P$2@4452.34,6092.99 ; v1(4765,5197.03) 4782.11,5179.92 U506.2@4782.11,5169.37 U506.3@4831.33,5169.37
  other v1: 4965.64,5194.96 4681.4,5220.36 3585.61,5224.15 5032.38,5304.03 3642.38,5317.68 3513.95,5337.68 4250.12,5362.64 3509.52,5423.78 4463.5,5462.65 3657.85,5511.3 5184.07,5581.15 5533.53,5599.15 5329.31,5650.95 3955.5,5677.68 3656.15,5711.94 4253.65,5768.74 4296.91,5769.88 4336.28,5769.88 4217.38,5770.67 5546.47,5787.99 5482.13,5792.77 4216.72,5814.58 4336.89,5815.66 4795.08,5830.33 5139.45,5853.95 4218.48,5860.83 4255.89,5860.83 4296.91,5860.83 4337.38,5860.83 5518.24,5867.3 5322.64,5914.15 5213.57,5924.15 5532.34,5950.17 4907.95,5959.15 4792.91,5964.98 5013.46,5981.83 4665.58,6007.15 4498.72,6020.36 4422.03,6069.4 3672.58,6083.5 5250.42,6137.1 5353.42,6137.1 4149.71,6148.88 3875.9,6182.52 4662.63,6185 4743.54,6203.84 5482.95,6209.15 4193.49,6212.53 4326.48,6235 5375.61,6274.15 4482.38,6312.68 4696.41,6339.15 5245.61,6374.15 5426.5,6407.91 5250.42,6464.15 3970.03,6529.27 4672.38,6552.68 4914.39,6570.12 3600.61,6579.15 4177.35,6629.13 4175.93,6663.91 4692.38,6695.36 4174.98,6701.6 5349.6,6724.15 5449.82,6726.32 3838.25,6737.95 4242.38,6747.68 4277.38,6747.68 3991.03,6780.15 3837.38,6781.98 5613.31,6784.3 4500.31,6815.36 5622.95,6881.06 4907.38,6972.68 4150.16,7028.05 4196.05,7106.35 5390.76,7127.68 4283.56,7201.24 3380.23,7205.36 3550.06,7207.13 3607.38,7225.67 4859.6,7227.68 5382.43,7329.51 3707.38,7339.9 5604.74,7350.6 5011.59,7396.22 4897.88,7477.68 4827.38,7492.68 3172.38,7502.68 4502.38,7588 3457.21,7611.22 4711.37,7621.52 4890.02,7647.68 3563.63,7659.53 3312.38,7695.17 4167.84,7762.66 3237.38,7852.68 4158.9,7912.68 3170.14,7942.68
GPIO_EXT_1: J403.6 U101.8 | length 352.7
  Top w8: v1(3880.42,6929.22) 3951.37,6929.22 4069.48,6811.11 U101.8@4117.38,6811.11
  Bottom w8: v1(3880.42,6929.22) 3897.82,6929.22 3898.64,6930.04 J403.6@3946.91,6930.04
GYRO_DRDY: U101.35 U501.6 U502.6 X503.5 | length 2677.8
  Top w7: X503.5@5152.97,5307.68 v1(5152.97,5427.24)
  Top w8: U101.35@4373.28,6397.72 4373.28,6457.37 4518.43,6602.52 4564.27,6602.52 4595.61,6571.18 4595.61,6548.86 4707.34,6437.13 4707.34,6423.48 4833.13,6297.68 v1@4959.85,6297.68 ; v1@4993.4,5837.68 5009.22,5853.49 5009.22,5905.64 4972.34,5942.52 4972.34,5983.61 4997.34,6008.61 4997.34,6060.48 4992.34,6065.48 ; U501.6@5027.54,6065.48 4992.34,6065.48 ; U502.6@5430.65,6112.62 5430.65,6137.33 5360.3,6207.68 5098.8,6207.68 5088.8,6197.68 5001.78,6197.68 4962.34,6158.24 v1(4962.34,6157.68) 4962.34,6087.68 4984.54,6065.48 4992.34,6065.48
  Bottom w7: v1@4993.4,5832.68 4962.37,5832.68 4932.37,5802.68 4932.34,5637.68 5057.34,5512.68 5115.38,5512.68 5152.97,5475.09 v1(5152.97,5427.24)
  Bottom w8: v1@4959.85,6297.68 4959.85,6292.79 4952.45,6292.79 4917.34,6257.68 4917.34,6217.68 4962.34,6172.68 v1(4962.34,6157.68)
  other v1: 4992.31,5836.38 4959.85,6292.68
IO-!RESET: C801.P$2 S801.A1 U801.7 U1002.3 | length 1319.8
  Top w7: v1(4537.34,6047.68) 4537.34,6032.68 4557.34,6012.68 4557.34,5987.98 4617.34,5927.98 4637.04,5927.98 4681.87,5883.15 U1002.3@4740.84,5883.15
  Top w8: S801.A1@3773.8,6211.81 3773.8,6162.63 C801.P$2@3784.57,6151.86 3797.07,6164.36 3900.36,6164.36 3929.44,6135.28 4134.16,6135.28 4196.76,6072.68 v1(4227.34,6072.68) 4227.34,6061.77 4251.43,6037.68 4265.65,6037.68 4282.5,6020.83 U801.7@4282.5,5982.76
  Bottom w8: v1(4227.34,6072.68) 4267.34,6112.68 4472.34,6112.68 v1(4537.34,6047.68)
IO-!VDD_SERVO_IN_FAULT: U801.38 U1001.4 | length 298.6
  Top w7: U801.38@4469.51,5717.01 4532.54,5717.01 4607.31,5642.24 v1(4607.31,5627.71) ; v1@4687.34,5632.68 4687.34,5625.28 4695.21,5633.15 U1001.4@4716.91,5633.15
  Bottom w7: v1(4607.31,5627.71) v1@4682.37,5627.71
  other v1: 4687.34,5627.71
IO-BOOT0: R801.P$1 U801.44 | length 71.3
  Top w7: U801.44@4469.51,5835.12 4512.96,5835.12 R801.P$1@4532.65,5815.43
IO-BOOT1: R802.P$1 U801.20 | length 89
  Top w7: R802.P$1@4031.72,5762.68 4045.1,5776.06 U801.20@4115.17,5776.06
IO-CH1: U801.10 U902.9 | length 1017.5
  Top w7: U902.9@3698.24,6001.58 3698.24,6018.58 3831.52,6151.86 3890.01,6151.86 3900.48,6141.39 3900.48,6110.51 3887.8,6097.83 3838.28,6097.83 3822.34,6081.89 3822.34,5997.99 3835.65,5984.68 3989.51,5984.68 4019.46,6014.63 4019.46,6037.64 4072.9,6091.07 4157.73,6091.07 4223.44,6025.36 U801.10@4223.44,5982.76
IO-CH1-PROT: J901.28 R917.P$2 | length 132.4
  Top w15: J901.28@3257.34,6227.68 3262.34,6222.68 R917.P$2@3387.65,6222.68
IO-CH2: U801.11 U902.8 | length 639.3
  Top w7: U902.8@3698.24,5981.89 3758.13,5981.89 3767.34,5972.68 4008.22,5972.68 4031.46,5995.93 4031.46,6032.5 4077.34,6078.37 4151.07,6078.37 4203.76,6025.68 U801.11@4203.76,5982.76
IO-CH3: U801.45 U902.7 | length 1188.2
  Top w7: U902.7@3698.24,5962.21 3732.81,5962.21 3799.55,5895.47 3860.13,5895.47 3872.34,5883.26 v1(3872.34,5877.68) ; U801.45@4469.51,5854.8 4526.55,5854.8 4534.43,5862.68 v1(4538.6,5862.68)
  Bottom w7: v1(3872.34,5877.68) 3872.34,5822.68 3892.34,5802.68 3960.65,5802.68 3975.01,5817.05 3975.01,5900.36 4009.34,5934.68 4165.65,5934.68 4194.41,5905.92 4309.3,5905.92 4338.06,5934.68 4495.34,5934.68 4538.6,5891.42 v1(4538.6,5862.68)
IO-CH4: U801.46 U902.6 | length 1110.3
  Top w7: U902.6@3698.24,5942.52 3730.85,5942.52 3798.88,5874.49 v1(3837.34,5874.49) ; U801.46@4469.51,5874.49 v1(4512.34,5874.49)
  Bottom w7: v1(3837.34,5874.49) 3837.34,5831.22 3880.88,5787.68 3962.34,5787.68 3965.34,5790.68 3965.62,5790.68 3987.01,5812.08 3987.01,5895.39 4014.31,5922.68 4160.68,5922.68 4189.44,5893.92 4314.27,5893.92 4343.03,5922.68 4490.37,5922.68 4512.34,5900.71 v1(4512.34,5874.49)
IO-CH5: U801.16 U902.5 | length 445.1
  Top w7: U902.5@3698.24,5922.84 3727.18,5922.84 3795.22,5854.8 U801.16@4115.17,5854.8
IO-CH6: U801.17 U902.4 | length 445.1
  Top w7: U902.4@3698.24,5903.15 3721.87,5903.15 3789.9,5835.12 U801.17@4115.17,5835.12
IO-CH7: U801.18 U902.3 | length 445.1
  Top w7: U902.3@3698.24,5883.47 3719.3,5883.47 3787.34,5815.43 U801.18@4115.17,5815.43
IO-CH8: U801.19 U902.1 | length 476.3
  Top w7: U902.1@3658.87,5844.1 3707.22,5795.75 U801.19@4115.17,5795.75
IO-CH8-PROT: J901.7 R905.P$2 | length 133.8
  Top w15: J901.7@3257.34,5527.68 3262.34,5522.68 R905.P$2@3389.05,5522.68
IO-SWCLK: JX802.4 U801.37 | length 405.8
  Top w7: U801.37@4469.51,5697.32 4509.51,5697.32 4617.34,5589.49 v1(4617.34,5452.68)
  Bottom w7: v1(4617.34,5452.68) 4617.34,5383.3 JX802.4@4622.34,5378.3
IO-SWDIO: JX802.2 U801.34 | length 376.9
  Top w8: U801.34@4361.24,5628.42 4361.24,5603.85 4492.34,5472.75 4492.34,5417.37 4537.34,5372.37 v1@4537.34,5371.88
  Bottom w8: v1@4537.34,5371.88 4537.34,5364.97 4559.01,5364.97 JX802.2@4572.34,5378.3
  other v1: 4538.6,5367.68
IO-SWO: JX802.6 U801.39 | length 485.6
  Top w7: U801.39@4469.51,5736.69 4543.33,5736.69 4631.88,5648.14 4631.88,5476.17 4647.34,5460.71 v1(4647.34,5452.68)
  Bottom w7: v1(4647.34,5452.68) 4672.34,5427.68 JX802.6@4672.34,5378.3
IO-USART1_RX: J801.P$3 JX801.2 U801.31 | length 892.3
  Top w7: v1@4297.34,5492.68 v1(4297.34,5497.68) 4304.54,5497.68 4307.34,5500.48 4307.34,5582.84 4302.18,5588 U801.31@4302.18,5628.42
  Bottom w7: J801.P$3@3811.4,5681.58 3811.4,5633.62 3847.34,5597.68 3847.34,5498.35 3948.19,5397.5 4207.15,5397.5 4262.34,5452.68 JX801.2@4262.34,5472.68 4277.34,5472.68 4297.34,5492.68 v1(4297.34,5497.68)
IO-USART1_TX: JX801.1 R101.P$2 U801.30 | length 234.1
  Top w7: v1@4194.7,5472.68 v1(4197.34,5475.32) 4197.34,5492.68 4272.34,5567.68 R101.P$2@4282.34,5567.68 4282.5,5567.84 U801.30@4282.5,5628.42
  Bottom w7: JX801.1@4162.34,5472.68 4194.7,5472.68 v1(4197.34,5475.32)
IO-VDD_3V3: C802.P$1 C803.P$1 C804.P$1 C901.P$1 C903.P$1 C1003.P$1 C1004.P$1 D701.C J702.1 JX802.1 U801.9 U801.24 U801.36 U801.48 U902.2 U902.10 U902.19 U903.8 U1002.7 | length 5285.4
  Top w7: U902.19@3560.44,5863.78 3579.77,5863.78 3598.67,5882.68 3658.98,5882.68 ; U903.8@3619.04,5282.8 3671.84,5282.8 C901.P$1@3681.71,5292.67 ; C903.P$1@3639.63,6074.22 3639.63,6040.5 U902.10@3658.87,6021.26 3658.87,5882.79 3658.98,5882.68 ; C901.P$1@3686.71,5287.67 3711.71,5287.67 3736.72,5312.68 3736.72,5397.06 3782.34,5442.68 v1(3782.34,5485.28) ; U902.2@3698.24,5863.78 3677.88,5863.78 3658.98,5882.68 ; v1(3701.98,5542.88) 3652.14,5542.88 3637.34,5557.68 3637.34,5861.04 3658.98,5882.68 ; v1@3812.65,5561.9 3863.43,5612.68 4001.72,5612.68 4032.03,5642.99 C802.P$1@4032.03,5662.99 4066.36,5697.32 ; v1(4057.34,5687.68) 4066.36,5697.32 ; U801.24@4115.17,5697.32 4066.36,5697.32 ; U801.9@4243.13,5982.76 4243.13,6014.37 4247.34,6018.58 v1(4247.03,6018.99) ; D701.C@4307.34,5426.79 4307.34,5407.68 4323.13,5391.89 J702.1@4323.13,5322.63 ; J702.1@4322.73,5318.11 4322.73,5277.29 4327.34,5272.68 4332.34,5272.68 4367.34,5237.68 4439.35,5237.68 4494.34,5292.67 4647.33,5292.67 4704.34,5349.68 4704.34,5475.68 4669.34,5510.68 4669.34,5667.22 4552.34,5784.22 4552.34,5836.45 4556.1,5840.21 4556.1,5907.94 4527.34,5936.7 ; U801.36@4400.61,5628.42 4447.65,5581.38 C804.P$1@4447.65,5572.99 4492.34,5528.3 4537.34,5528.3 4546.83,5537.79 v1(4546.83,5542.68) ; U801.48@4469.51,5913.86 4504.5,5913.86 4527.34,5936.7 ; U1002.7@4803.84,5902.83 4850.77,5902.83 4876.4,5928.46 C1003.P$1@4821.87,5982.99 4822.82,5983.94 4822.82,6005.12 4807.34,6020.6 4745.82,6020.6 4740,6014.79 4740,5982.87 4714.81,5957.68 4652.34,5957.68 4627.34,5982.68 4582.03,5982.68 4570.14,5994.57 4570.14,6042.68 4538.6,6074.22 4497.94,6074.22 4472.34,6048.62 4472.34,5982.68 4496.72,5958.3 C803.P$1@4527.34,5958.3 4527.34,5936.7
  Bottom w7: v1(3701.98,5542.88) 3769.74,5542.88 3782.34,5530.28 ; v1(3782.34,5485.28) 3782.34,5530.28 ; v1@3812.65,5561.9 3817.34,5565.28 3782.34,5530.28 ; v1(4247.03,6018.99) 4247.03,6056.54 4284.41,6093.92 4462.91,6093.92 v1(4492.34,6064.49) ; v1(4317.34,5390.28) 4329.32,5378.3 4482.34,5378.3 4545.47,5441.43 4545.47,5542.68 4549.85,5538.3 JX802.1@4572.34,5538.3
  Bottom w8: v1(4057.34,5687.68) 4119.84,5625.18 4344.84,5625.18 4427.34,5542.68 4545.47,5542.68 v1(4546.83,5542.68)
  other v1: 3817.34,5567.68
IO-VDD_5V5: C1001.P$1 C1005.P$1 D1001.3 J901.2 LED702.A LED703.A LED705.A U1002.1 U1002.4 | length 3101.7
  Top w10: J901.2@3157.34,5327.68 3157.34,5243.11 3197.77,5202.68 3701.98,5202.68 3762.13,5262.83 LED702.A@3817.34,5262.83 3897.34,5262.83 LED703.A@3972.18,5262.83 ; LED703.A@3972.34,5262.99 4082.65,5152.68 4568.88,5152.68 4588.88,5172.68 4588.88,5234.22 4612.34,5257.68 4651.23,5257.68 4781.23,5387.68 4897.34,5387.68 4912.34,5402.68 4912.34,5517.68 ; v1(4692.34,5906.46) 4692.34,5913.86 4701,5922.52 U1002.1@4740.84,5922.52 ; D1001.3@4737.34,5452.68 4782.34,5497.68 4892.34,5497.68 4912.34,5517.68 ; U1002.4@4740.84,5863.46 4740.84,5843.47 4722.34,5824.97 C1005.P$1@4692.34,5852.99 v1(4722.34,5822.99) C1001.P$1@4722.34,5782.99 4807.34,5782.99 4882.34,5707.99 4882.34,5586.38 4912.34,5556.38 4912.34,5517.68
  Bottom w10: v1(4692.34,5906.46) 4692.34,5854.85 4716.91,5830.28 v1(4722.34,5822.99)
MAG_DRDY: U101.36 U504.9 X503.4 | length 4502.4
  Top w7: U101.36@4392.97,6397.72 4392.97,6292.67 4412.34,6273.3 v1(4409.91,6274.07) ; v1@5094.08,5373.3 v1(5093.92,5373.14) 5093.92,5456.23 5172.34,5534.65 5242.34,5534.65 5274.83,5567.14 5274.83,5729.07 5333.74,5787.99 5365.68,5787.99 U504.9@5384.02,5769.65 ; v1(5102.34,5174.07) 5133.29,5205.02 X503.4@5133.29,5307.68 v1(5133.29,5366.88) v1@5133.29,5371.88
  Bottom w7: v1(4409.91,6274.07) 4389.31,6253.47 4359.85,6253.47 4312.64,6300.68 4188.37,6300.68 4146.37,6342.68 4104.66,6342.68 4044.34,6282.36 4044.34,6227.65 4079.31,6192.68 4104.66,6192.68 4117.34,6180.01 4117.34,6148.74 4068.78,6100.18 3912.34,6100.18 3879.84,6067.68 3879.84,5927.5 3860.01,5907.68 3802.34,5907.68 3557.34,5662.68 3557.34,5197.68 3600.02,5155 5084.65,5155 5102.34,5172.68 v1(5102.34,5174.07) ; v1(5093.92,5373.14) 5094.08,5373.3 5102.41,5364.97 5132.34,5364.97 5132.61,5366.97 v1@5133.29,5371.88
MPU_DRDY: U101.62 U505.12 | length 1524.3
  Top w7: U101.62@4747.3,6692.99 4830.21,6692.99 4863.96,6659.24 4875.78,6659.24 v1(4901.95,6633.07) ; v1@4951.84,6492.68 4992.34,6492.68 5022.34,6462.68 5022.34,6313.5 v1(5043.16,6292.68) ; U505.12@5024.22,5678.78 4931.24,5678.78 4917.34,5692.68 4917.34,5756.04 4942.34,5781.04 4942.34,6213.79 4971.22,6242.68 v1(5112.34,6242.68)
  Bottom w7: v1(4901.95,6633.07) 4901.95,6622.48 4941.84,6582.59 4941.84,6502.68 4951.84,6492.68 v1@4952.34,6492.68 ; v1(5043.16,6292.68) 5045.84,6292.68 5072.2,6292.68 5112.34,6252.54 v1(5112.34,6242.68)
  other v1: 4953.67,6495.36
N$1: C103.P$2 U101.13 X101.1 | length 273.6
  Top w8: C103.P$2@3933.57,6605.99 3947.34,6619.76 X101.1@3947.34,6697.68 3962.34,6712.68 U101.13@4117.38,6712.68
N$2: C102.P$1 U101.12 X101.3 | length 355.9
  Top w8: C102.P$1@3894.19,6875.99 3880.42,6862.22 X101.3@3880.42,6784.3 3927.04,6737.68 4042.34,6737.68 4047.65,6732.37 U101.12@4117.38,6732.37
N$3: R918.P$2 R922.P$1 | length 52.2
  Top w7: R922.P$1@3792.34,5952.99 3794.34,5950.99 R918.P$2@3843.75,5950.99
N$4: D1001.2 U1001.8 | length 374.2
  Top w7: D1001.2@4699.94,5535.36 4699.94,5536.85 4740.84,5577.75 4842.72,5577.75 4867.34,5602.37 4867.34,5692.6 4852.73,5707.21 4807.34,5707.21 4792.34,5692.21 U1001.8@4791.71,5692.21
N$5: D201.C J201.1 L201.P$2 | length 197
  Top w8: J201.1@5000.37,7912.25 5000.37,7867.36 5047.34,7820.39 5047.34,7762.95 D201.C@5067.33,7742.96
N$6: C509.P$1 U504.15 | length 75.2
  Top w8: U504.15@5437.96,5676.34 5437.96,5657.68 C509.P$1@5477.96,5617.68
N$7: LED704.C R711.P$2 | length 59.6
  Top w7: R711.P$2@4112.34,5377.99 4122.34,5367.99 LED704.C@4122.34,5322.52
N$8: C613.P$1 U101.73 | length 78.7
  Top w7: U101.73@4747.3,6909.53 4798.12,6909.53 C613.P$1@4817.81,6929.22
N$9: LED705.C R712.P$2 | length 51.1
  Top w7: LED705.C@3897.34,5322.05 R712.P$2@3897.34,5373.14
N$10: C510.P$1 U504.2 | length 61.2
  Top w8: U504.2@5491.9,5710.59 5535.56,5710.59 C510.P$1@5547.96,5722.99
N$11: C602.P$2 U603.6 | length 132.8
  Top w7: C602.P$2@5442.03,6278.9 5464.18,6278.9 5491.9,6306.62 5491.9,6343.09 5487.14,6347.84 U603.6@5458.84,6347.84
N$12: C611.P$1 U101.49 | length 127
  Top w8: U101.49@4648.88,6397.72 4648.88,6351.45 4702.65,6297.68 C611.P$1@4707.34,6297.68
N$13: R707.P$2 R735.P$1 | length 50.3
  Top w7: R735.P$1@4045.12,5417.68 R707.P$2@4045.12,5467.99
N$14: J203.4 R215.P$2 | length 1895
  Top w8: J203.4@3172.77,7643.07 3212.69,7643.07 v1(3222.34,7652.72) ; R215.P$2@4371.94,7172.37 v1(4371.94,7196.49)
  Bottom w8: v1(3222.34,7652.72) 3228.13,7657.72 3347.34,7776.93 3347.34,7814.45 3425.57,7892.68 3992.34,7892.68 4047.65,7837.37 4047.65,7642.68 4032.34,7627.37 4032.34,7592.99 4047.65,7577.68 4047.65,7477.37 4239.86,7285.16 4342.03,7285.16 4372.34,7254.85 4372.34,7197.68 v1(4371.94,7196.49)
N$15: R803.P$1 U801.12 | length 86.5
  Top w7: R803.P$1@4132.03,6047.68 4184.07,5995.64 U801.12@4184.07,5982.76
N$16: R804.P$1 U801.13 | length 96.6
  Top w7: R804.P$1@4052.34,5958.61 4052.34,5932.68 4071.16,5913.86 U801.13@4115.17,5913.86
N$17: C510.P$2 U504.3 | length 69.4
  Top w8: U504.3@5491.9,5730.28 5509.94,5730.28 5542.03,5762.37 C510.P$2@5547.96,5762.37
N$18: C806.P$2 U801.6 X801.1 | length 222
  Top w7: C806.P$2@4196.12,6151.85 4254.98,6092.99 4270.26,6092.99 X801.1@4289.03,6074.22 4302.18,6061.07 U801.6@4302.18,5982.76
N$19: J203.5 R216.P$2 | length 3108
  Top w8: v1(3112.34,7306.58) 3224.74,7418.99 3224.74,7577.68 3208.56,7593.86 J203.5@3172.77,7593.86 ; v1(3147.34,6927.68) 3147.93,6927.68 3167.93,6907.68 3370.65,6907.68 3411.87,6866.46 3411.87,6838.24 ; 3411.87,6807.12 3411.87,6477.68 3437.49,6452.06 v1(3457.96,6452.06) ; 3411.89,6807.14 3411.89,6838.22 ; v1(4817.34,6382.68) 4817.34,6397.68 4827.34,6407.68 R216.P$2@4827.34,6412.99
  Bottom w8: v1(3112.34,7306.58) 3112.93,7306.58 3112.93,6962.09 v1(3147.34,6927.68) ; v1(4817.34,6382.68) 4817.34,6362.15 4817.82,6361.67 4743.27,6287.12 4441.4,6287.12 4403.34,6325.18 4200.19,6325.18 4157.19,6368.18 4095.51,6368.18 4052.51,6325.18 3872.16,6325.18 3782.16,6415.18 3494.84,6415.18 ; 3494.84,6415.18 v1(3457.96,6452.06) 3494.84,6415.18
N$20: R1001.P$2 U1001.7 | length 47.1
  Top w7: U1001.7@4791.71,5672.52 4833.71,5672.52 R1001.P$2@4837.34,5676.15
N$21: D602.C R608.P$2 | length 62.4
  Top w8: R608.P$2@3897.34,7107.68 3951.55,7107.68 D602.C@3957.34,7101.89
N$22: C805.P$1 U801.5 X801.3 | length 258.9
  Top w7: U801.5@4321.87,5982.76 4321.87,6036.59 4332.34,6047.06 4332.34,6097.83 X801.3@4375.65,6141.14 4379.42,6137.37 C805.P$1@4452.34,6137.37
N$23: R101.P$1 U101.69 | length 4171.7
  Top w8: v1(4227.34,5322.16) 4227.34,5473.3 R101.P$1@4282.34,5528.3 ; U101.69@4747.3,6830.79 4820.58,6830.79 4852.47,6862.68 4977.34,6862.68 v1(4982.34,6857.68) ; v1(5322.03,6867.37) 5322.03,6863.58 5322.82,6862.79 v1(5402.34,6862.79)
  Bottom w8: v1(4227.34,5322.16) 4299.22,5250.28 5170.28,5250.28 5227.68,5307.68 5472.34,5307.68 5647.34,5482.68 5647.34,6802.66 5580,6870 5494.65,6870 5452.34,6827.68 5432.34,6827.68 5402.34,6857.68 v1(5402.34,6862.79) ; v1@4982.37,6857.68 5000.37,6839.68 5000.37,6796.27 5017.34,6779.3 5233.96,6779.3 v1(5322.03,6867.37)
N$24: R705.P$2 R706.P$1 U702.2 | length 162.7
  Top w8: U702.2@4838.6,7412.89 4907.55,7412.89 R706.P$1@4912.34,7417.68 4912.34,7344.85 R705.P$2@4902.34,7334.85
N$25: R702.P$1 R703.P$2 U702.8 | length 170.9
  Top w8: U702.8@4746.08,7387.3 4746.08,7313.53 4766.51,7293.09 R703.P$2@4781.5,7293.09 4777.65,7289.24 R702.P$1@4777.65,7241.42
N$26: LED701.C R735.P$2 | length 57
  Top w7: R735.P$2@4045.12,5378.3 4046.94,5376.48 LED701.C@4046.94,5322.05
N$27: C703.P$1 J701.1 R703.P$1 U702.1 | length 867.3
  Top w8: R703.P$1@4781.5,7332.47 4840.27,7332.47 C703.P$1@4842.34,7334.54 4842.34,7383.56 U702.1@4838.6,7387.3
  Bottom w7: v1@4837.34,7362.68 v1@4842.34,7357.68 ; v1(4842.73,7362.68) v1@4842.34,7357.68 ; J701.1@5441.91,7622.29 5136.95,7622.29 4872.34,7357.68 ; v1@4842.34,7357.68 4872.34,7357.68 ; v1@4842.34,7357.68 4872.34,7357.68
N$28: R701.P$1 U702.7 | length 125.3
  Top w8: R701.P$1@4712.34,7329.54 4702.34,7339.54 4702.34,7402.68 4712.55,7412.89 U702.7@4746.08,7412.89
N$29: LED702.C R708.P$2 | length 56.2
  Top w7: LED702.C@3817.34,5321.89 R708.P$2@3817.34,5378.14
N$30: C505.P$1 U502.14 | length 57.7
  Top w7: C505.P$1@5389.82,5947.68 5389.82,6003.29 U502.14@5391.27,6004.74
N$31: J901.10 R914.P$2 | length 132.7
  Top w15: J901.10@3257.34,5627.68 3262.34,5622.68 R914.P$2@3387.96,5622.68
N$32: L701.P$2 U702.5 | length 194.6
  Top w8: U702.5@4746.08,7464.08 4727.34,7482.82 4727.34,7587.25 L701.P$2@4772.34,7632.25
N$33: J401.2 R404.P$2 | length 105
  Top w8: R404.P$2@3472.34,7809.12 3476.95,7813.73 J401.2@3476.95,7912.25
N$34: R616.P$1 U602.7 | length 66.9
  Top w7: R616.P$1@5421.71,6687.79 5426.56,6687.79 5449,6665.35 U602.7@5449,6635.08
N$35: C504.P$1 U501.14 | length 162.5
  Top w7: U501.14@5177.14,6039.88 5207.84,6039.88 5218.08,6029.64 5218.08,5963.78 C504.P$1@5181.67,5927.37
N$36: C704.P$1 R705.P$1 U702.6 | length 879.6
  Top w8: U702.6@4746.08,7438.49 4709,7438.49 4697.34,7450.15 C704.P$1@4697.34,7555.16 4679.86,7555.16 4662.34,7572.68 4662.34,7612.68 4712.34,7662.68 4806.08,7662.68 4817.03,7651.73 4817.03,7595.12 4824.9,7587.25 4876.31,7587.25 4897.34,7566.22 4897.34,7512.85 4937.55,7472.64 4937.55,7317.05 4915.97,7295.47 R705.P$1@4902.34,7295.47
N$37: J401.3 R405.P$2 | length 106.8
  Top w8: R405.P$2@3422.34,7807.68 3427.73,7813.07 J401.3@3427.73,7912.25
N$38: D902.C R901.P$2 R910.P$1 U903.3 | length 272.2
  Top w8: D902.C@3428.43,5372.68 R910.P$1@3428.43,5422.68 3428.43,5446.25 3459.86,5477.68 R901.P$2@3552.65,5477.68 3567.85,5462.48 U903.3@3567.85,5422.56
N$39: R709.P$2 R736.P$1 | length 50.3
  Top w7: R736.P$1@3972.34,5417.52 R709.P$2@3972.34,5467.83
N$40: LED703.C R736.P$2 | length 56.1
  Top w7: LED703.C@3972.34,5322.05 R736.P$2@3972.34,5378.14
N$41: D402.C J403.1 L402.P$2 | length 249.5
  Bottom w8: J403.1@3946.91,7176.11 3993.84,7223.04 L402.P$2@3993.84,7347.68 D402.C@4052.34,7347.68
N$42: D401.C J401.1 J402.1 L401.P$2 | length 630.6
  Top w8: J401.1@3526.16,7912.25 3726.91,7912.25 3792.34,7977.68 3902.34,7977.68 3916.55,7963.47 J402.1@3916.55,7912.25 3916.55,7881.89 3897.34,7862.68 3897.34,7826.18 L401.P$2@3900.84,7822.68 3897.65,7819.49 D401.C@3897.65,7766.93
N$43: R905.P$1 U902.20 | length 392.4
  Top w8: R905.P$1@3428.43,5522.68 3467.65,5561.9 3467.65,5711.94 U902.20@3599.81,5844.1
N$44: R914.P$1 U902.18 | length 331.1
  Top w8: R914.P$1@3427.34,5622.68 3452.81,5648.15 3452.81,5773.15 3503.34,5823.68 3503.34,5852.25 3534.56,5883.47 U902.18@3560.44,5883.47
N$45: R906.P$1 U902.17 | length 253.1
  Top w8: R906.P$1@3427.03,5722.68 3427.03,5767.37 3490.34,5830.68 3490.34,5862.68 3530.81,5903.15 U902.17@3560.44,5903.15
N$46: D1001.1 F1001.2 | length 78.6
  Top w7: D1001.1@4774.74,5535.36 4849.9,5535.36 F1001.2@4852.34,5537.8
N$47: C1108.P$1 R1105.P$2 R1106.P$1 U1101.P$1 | length 317.4
  Top w8: R1106.P$1@3515.48,7567.84 3546.23,7567.84 ; U1101.P$1@3582.38,7531.69 3546.23,7567.84 ; R1105.P$2@3645.48,7652.22 3645.48,7669.54 3632.34,7682.68 3557.03,7682.68 3540.17,7665.82 C1108.P$1@3540.17,7617.84 3540.17,7573.9 3546.23,7567.84